# Altium PCB STM32.PcbDoc (part 1 of 6)
Units mm, origin at the board's own origin, x right, y up, seen from the top; angles counter-clockwise.
Board outline 99.69 x 99.7 mm, 2 copper layers (Top Layer, Bottom Layer); 150 components, 142 nets, 668 pads, 273 vias.
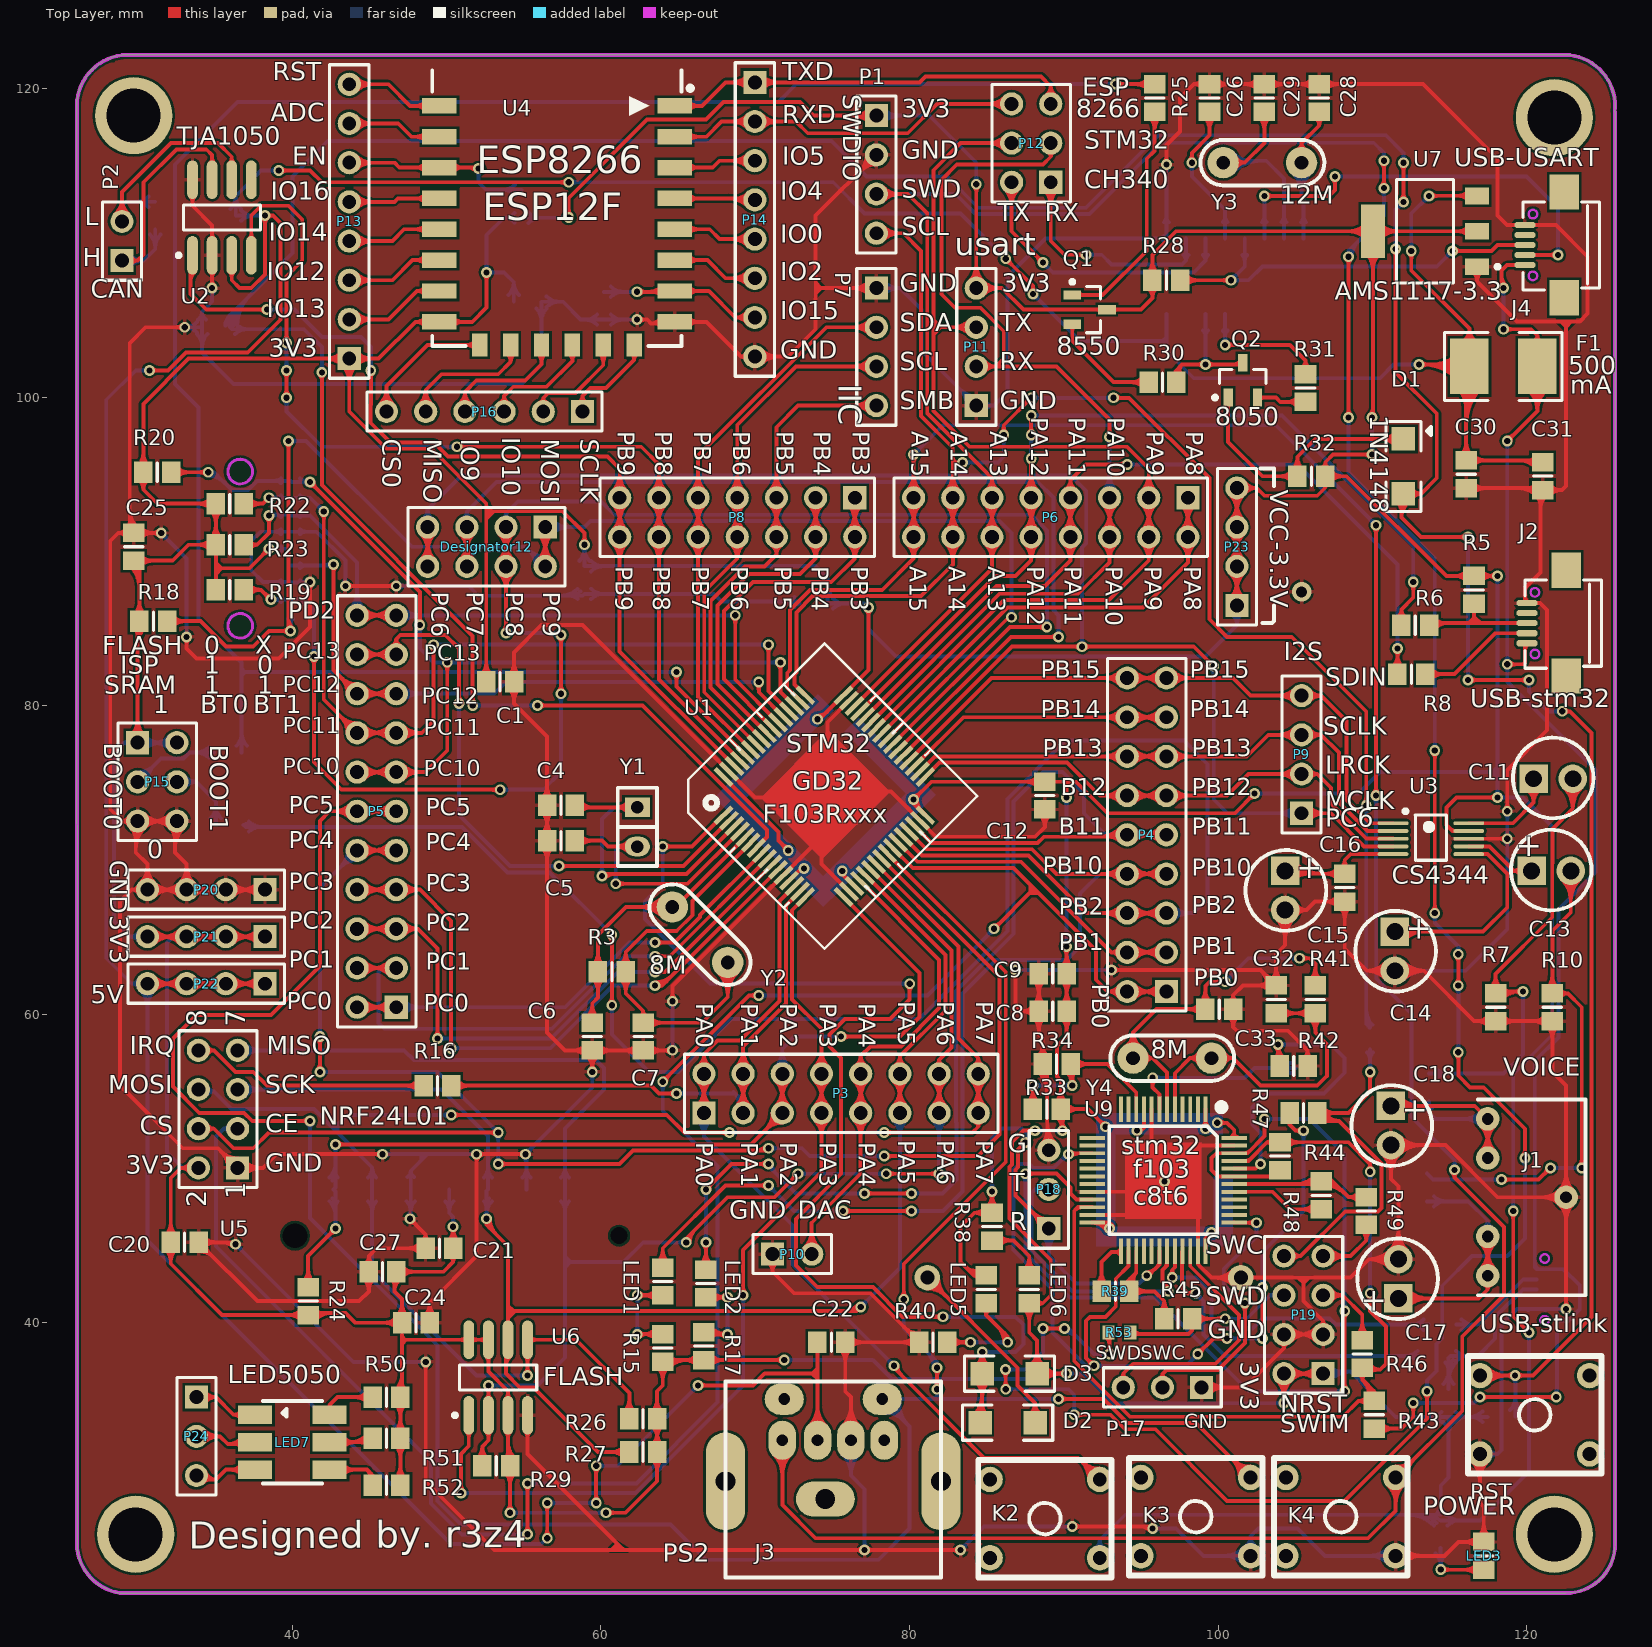
[diagram p0: Top Layer view]
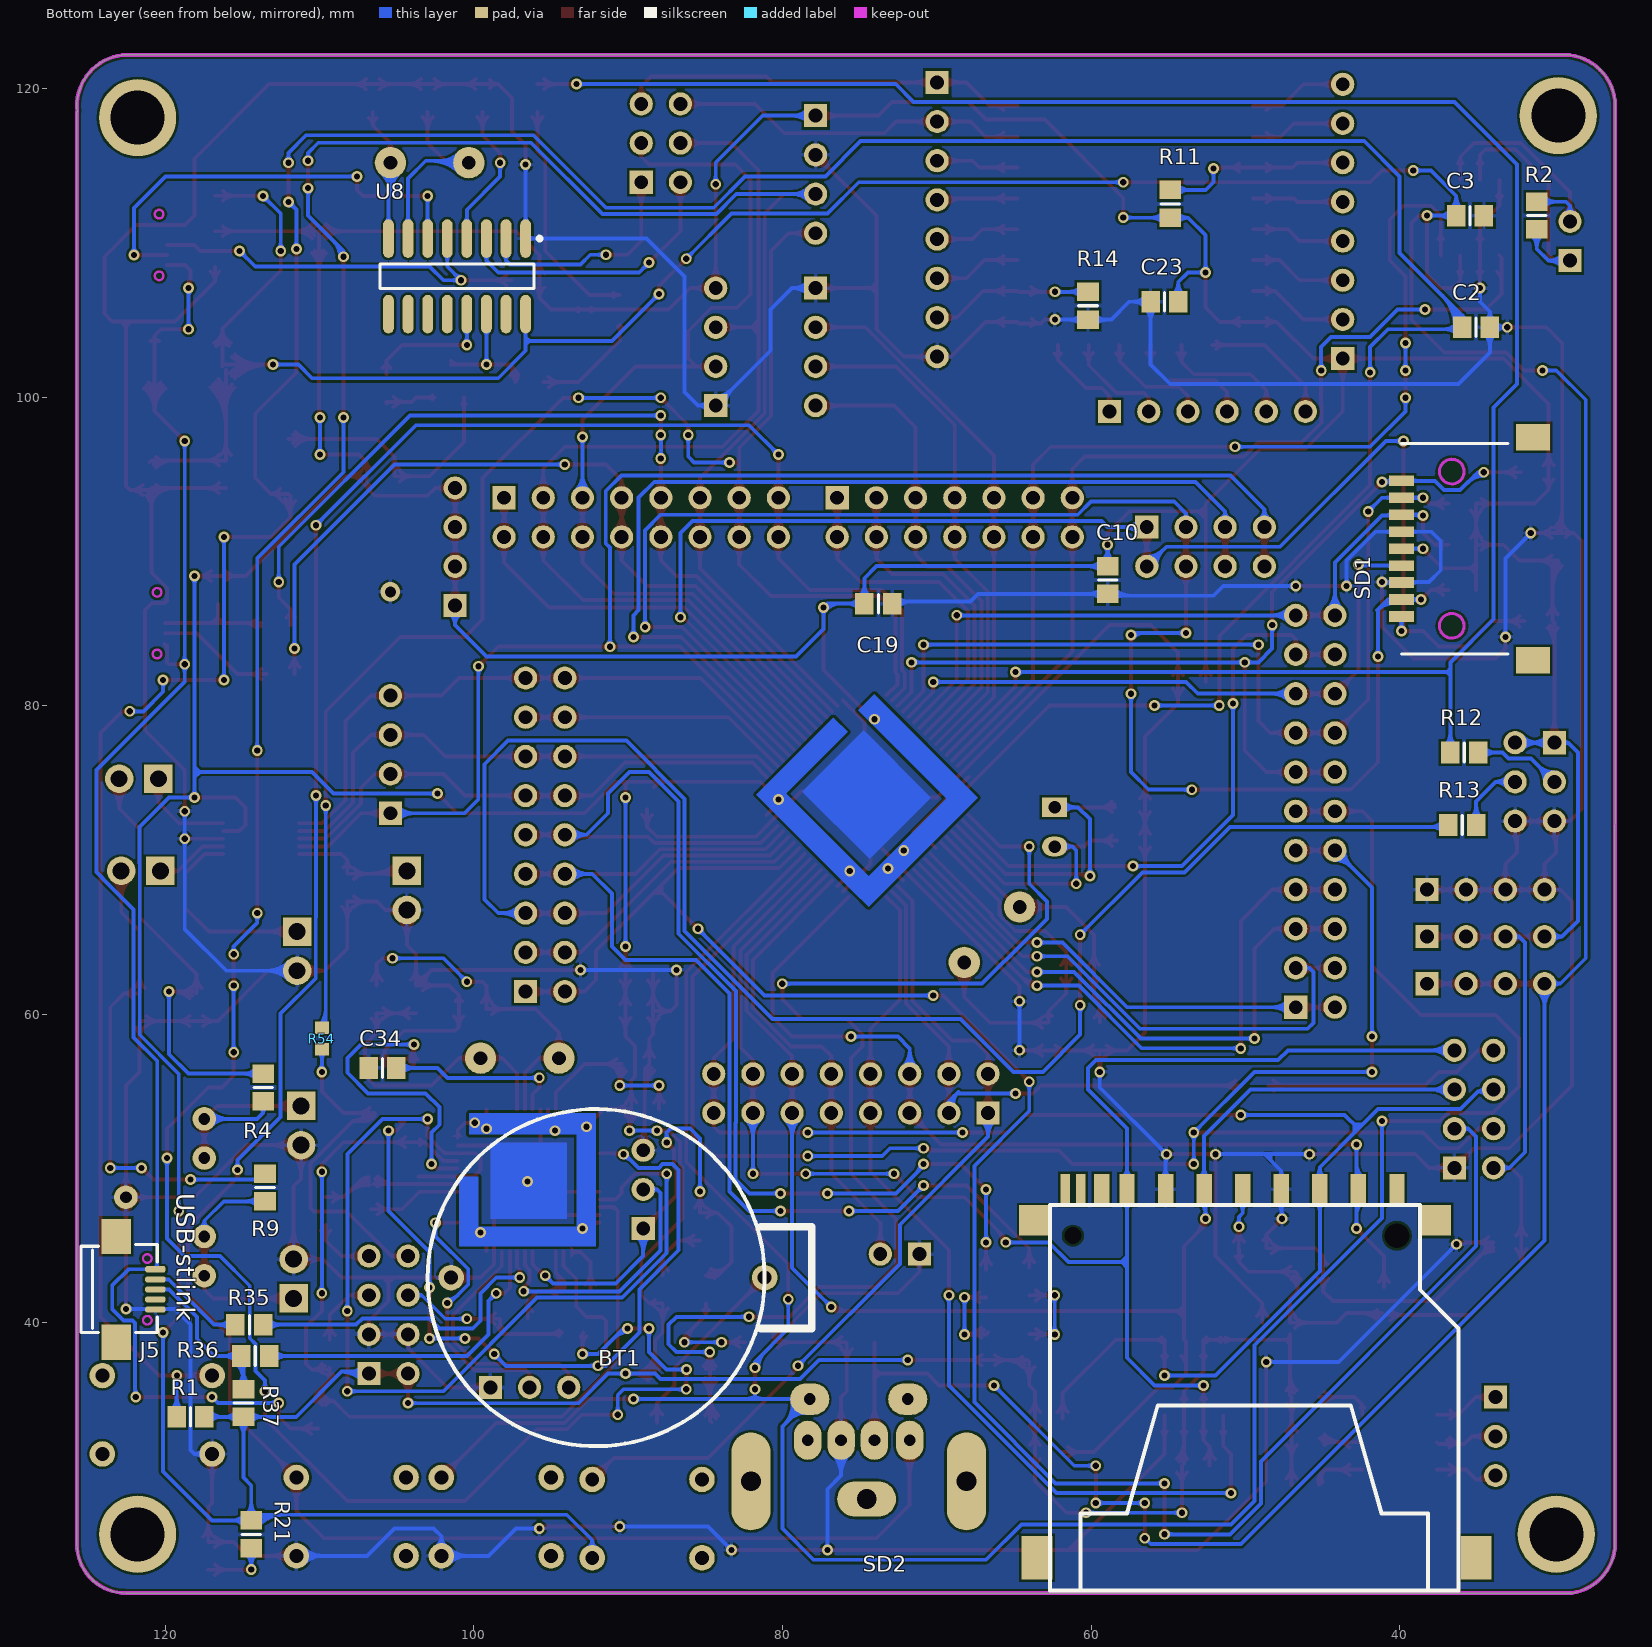
[diagram p1: Bottom Layer view, seen from below]

## Layer stack, top to bottom
Top Solder: solder mask 0.0102, Solder Resist, Dk 3.5
Top Layer: signal copper 0.0356
Dielectric1: dielectric 0.32, FR-4, Dk 4.8
Bottom Layer: signal copper 0.0356
Bottom Solder: solder mask 0.0102, Solder Resist, Dk 3.5

## Board outline
26.051,25.366 ccw(c29.332,25.743) 28.829,22.479 122.555,22.479 ccw(c122.555,25.654) 125.73,25.654 125.73,118.491 125.708,118.494 ccw(c122.428,118.872) 122.806,122.152 122.806,122.174 28.956,122.174 28.958,122.152 ccw(c29.335,118.872) 26.054,119.251 26.035,119.253

## Design rules (kind name [scope] priority, off if disabled: settings)
Clearance [All] p1: gap=0.152 ignorepadtopadclearanceinfootprint=FALSE except(0: Arc-Hole Track-Hole SMDPad-Hole THPad-Hole Via-Hole Fill-Hole Poly-Hole Region-Hole Text-Hole)
PolygonConnect [All] p1: connectstyle=Relief reliefconductorwidth=0.254 reliefentries=4 polygonreliefangle="90 Angle" airgapwidth=0.254
RoutingVias [All] p1: holewidth=0.4 width=0.7 viastyle="Through Hole" minholewidth=0.4 minwidth=0.7 maxholewidth=0.4 maxwidth=0.7
SMDNeckDown [All] p1: percent=50.000
SolderMaskExpansion [All] p1: expansion=0.102 istentingtop=FALSE
Width [All] p1: maxlimit=0.8 minlimit=0.25 preferedwidth=0.5
30 further rules are at their usual default settings.

## Classes and differential pairs
component class STLINK: C32 C33 J5 LED5 LED6 LED7 P17 P18 P19 P20 P21 P22 P23 P24 R33 R34 R35 R36 R37 R38 R39 R40 R41 R43 R44 R45 R46 R47 R48 R49 R50 R51 R52 R53 R54 U9 Y4
component class STM32: BT1 C1 C2 C3 C4 C5 C6 C7 C8 C9 C10 C11 C12 C13 C14 C15 C16 C17 C18 C19 C20 C21 C22 C23 C24 C25 C26 C27 C28 C29 C30 C31 D1 D2 D3 F1 J1 J2 J3 J4 K2 K3 K4 LED1 LED2 LED3 P1 P2 P3 P4 P5 P6 P7 P8 P10 P11 P13 P14 P15 P16 Q1 Q2 R1 R2 R3 R4 R5 R6 R7 R8 R9 R10 R11 R12 R13 R14 R15 R16 R17 R18 R19 R20 R21 R22 R23 R24 R25 R26 R27 R28 R29 R30 R31 R32 RST SD1 SD2 U1 U2 U3 U4 U5 U6 U7 U8 Y1 Y2 Y3

## Components (designator, comment, footprint, x,y, rotation, side; value= is the part's Value field where it differs from the comment)
BT1 "电池" µç³Ø×ù 65.786,24.13 r270 bottom locked
C1 "Cap" 6-0805_N 53.467,81.534 r0 top
C2 "Cap" 6-0805_N 35.052,104.521 r180 bottom
C3 "Cap" 6-0805_N 35.433,111.76 r0 bottom
C4 "Cap" 6-0805_N 57.404,73.533 r0 top
C5 "Cap" 6-0805_N 57.404,71.247 r0 top
C6 "Cap" 6-0805_N 59.436,58.547 r90 top
C7 "Cap" 6-0805_N 62.738,58.547 r90 top
C8 "Cap" 6-0805_N 89.281,60.198 r0 top
C9 "Cap" 6-0805_N 89.281,62.611 r0 top
C10 "Cap" 6-0805_N 58.928,88.138 r270 bottom
C11 "Cap Pol3" ¼«ÐÔµçÈÝ 121.92,75.946 r0 top
C12 "Cap" 6-0805_N 88.773,74.168 r270 top
C13 "Cap Pol3" ¼«ÐÔµçÈÝ 121.793,69.977 r0 top
C14 "Cap Pol3" ¼«ÐÔµçÈÝ 112.141,63.881 r270 top
C15 "Cap Pol3" ¼«ÐÔµçÈÝ 105.029,67.818 r270 top
C16 "Cap" 6-0805_N 108.204,68.199 r270 top
C17 "Cap Pol3" ¼«ÐÔµçÈÝ 110.998,43.053 r90 top
C18 "Cap Pol3" ¼«ÐÔµçÈÝ 111.887,52.578 r270 top
C19 "Cap" 6-0805_N 73.787,86.614 r180 bottom
C20 "Cap" 6-0805_N 33.02,45.212 r180 top
C21 "Cap" 6-0805_N 49.53,44.831 r180 top
C22 "Cap" 6-0805_N 74.93,38.735 r180 top
C23 "Cap" 6-0805_N 55.245,106.172 r0 bottom
C24 "Cap" 6-0805_N 48.006,40.005 r0 top
C25 "Cap" 6-0805_N 29.718,90.297 r90 top
C26 "Cap" 6-0805_N 99.441,119.38 r90 top
C27 "Cap" 6-0805_N 45.847,43.307 r180 top
C28 "Cap" 6-0805_N 106.553,119.38 r270 top
C29 "Cap" 6-0805_N 102.997,119.38 r270 top
C30 "Cap" 6-0805_N 116.078,94.996 r90 top
C31 "Cap" 6-0805_N 121.031,94.869 r90 top
C32 "Cap" 6-0805_N 103.759,60.96 r270 top
C33 "Cap" 6-0805_N 100.076,60.325 r180 top
C34 "Cap" 6-0805_N 105.918,56.515 r180 bottom
D1 "1N4148" 1206 112.014,95.504 r90 top
D2 "1N4148" 1206 86.36,33.528 r180 top
D3 "1N4148" 1206 86.487,36.703 r180 top
Designator12 "Comment" HDR2X4 56.388,91.567 r180 top
F1 "500MA" 1812 118.491,101.981 r0 top
J1 "Component_1" ¶ú»ú×ù 122.555,48.133 r90 top
J2 "USB_M" "USB MICRO 2" 122.555,85.344 r90 top
J3 "PS/2" PS/2 68.072,23.495 r90 top
J4 "USB_M" "USB MICRO 2" 122.428,109.855 r90 top
J5 "USB_M" "USB MICRO 2" 123.19,42.164 r270 bottom
K2 "按键" °´¼ü 88.773,27.305 r270 top
K3 "按键" °´¼ü 98.552,27.432 r270 top
K4 "按键" °´¼ü 107.95,27.432 r270 top
LED1 "LED" 6-0805_N 64.008,42.672 r90 top
LED2 "LED" 6-0805_N 66.802,42.545 r90 top
LED3 "LED" 6-0805_N 117.221,24.892 r90 top
LED5 "LED" 6-0805_N 84.963,42.164 r270 top (schematic designator D2)
LED6 "LED" 6-0805_N 87.757,42.164 r90 top (schematic designator D3)
LED7 "50550" led5050 40.005,32.258 r0 top
P1 "stlink" HDR1X4 77.851,118.237 r270 top
P2 "Header 2" HDR1X2 28.956,108.839 r90 top
P3 "Header 8X2" HDR2X8 66.675,53.594 r0 top
P4 "Header 9X2" HDR2X9 96.647,61.468 r90 top
P5 "Header 11X2" HDR2X11 46.736,60.452 r90 top
P6 "Header 8X2" HDR2X8 98.044,93.472 r180 top
P7 "I2C" HDR1X4 77.851,107.061 r270 top
P8 "Header 7X2" HDR2X7 76.454,93.472 r180 top
P9 "Header 4" HDR1X4 105.41,73.025 r90 top
P10 "DAC" HDR1X2 71.12,44.45 r0 top
P11 "串口" HDR1X4 84.328,99.441 r90 top
P12 "串口选择" HDR2X3 89.154,113.919 r90 top
P13 "Header 8" HDR1X8 43.688,102.489 r90 top
P14 "Header 8" HDR1X8 69.977,120.396 r270 top
P15 "boot选择" HDR2X3 29.972,77.597 r270 top
P16 "Header 6" HDR1X6 58.801,99.06 r180 top
P17 "ST-LINK" HDR1X3 98.933,35.814 r180 top
P18 "串口" HDR1X3 89.027,46.101 r90 top
P19 "Header 4X2" HDR2X4 106.807,36.703 r90 top
P20 "Header 4" HDR1X4 38.227,68.072 r180 top
P21 "Header 4" HDR1X4 38.227,65.024 r180 top
P22 "Header 4" HDR1X4 38.227,61.976 r180 top
P23 "Header 4" HDR1X4 101.219,86.487 r90 top (schematic designator P21)
P24 "Header 3" HDR1X3 33.782,35.179 r270 top
Q1 "8550" SOT-23B_N 91.676,105.664 r0 top
Q2 "8050" SOT-23B_N 101.6,101.092 r90 top
R1 "Res2" 6-0805_N 118.364,33.909 r0 bottom
R2 "Res2" 6-0805_N 31.115,111.76 r90 bottom
R3 "Res2" 6-0805_N 60.706,62.738 r0 top
R4 "Res2" 6-0805_N 113.665,55.245 r90 bottom
R5 "Res2" 6-0805_N 116.586,87.503 r270 top
R6 "Res2" 6-0805_N 112.776,85.217 r0 top
R7 "Res2" 6-0805_N 117.983,60.452 r90 top
R8 "Res2" 6-0805_N 112.522,82.042 r0 top
R9 "Res2" 6-0805_N 113.538,48.768 r270 bottom
R10 "Res2" 6-0805_N 121.666,60.452 r90 top
R11 "Res2" 6-0805_N 54.864,112.522 r90 bottom
R12 "Res2" 6-0805_N 35.814,76.962 r180 bottom
R13 "Res2" 6-0805_N 35.941,72.263 r0 bottom
R14 "Res2" 6-0805_N 60.198,105.918 r90 bottom
R15 "Res2" 6-0805_N 64.008,38.365 r90 top
R16 "Res2" 6-0805_N 49.403,55.372 r0 top
R17 "Res2" 6-0805_N 66.675,38.481 r90 top
R18 "Res2" 6-0805_N 30.988,85.471 r0 top
R19 "Res2" 6-0805_N 35.941,87.503 r0 top
R20 "Res2" 6-0805_N 31.242,95.123 r0 top
R21 "Res2" 6-0805_N 114.427,26.289 r270 bottom
R22 "Res2" 6-0805_N 35.941,93.091 r0 top
R23 "Res2" 6-0805_N 35.941,90.424 r0 top
R24 "Res2" 6-0805_N 41.021,41.402 r90 top
R25 "Res2" 6-0805_N 95.885,119.38 r90 top
R26 "Res2" 6-0805_N 62.738,33.782 r180 top
R27 "Res2" 6-0805_N 62.738,31.623 r180 top
R28 "Res2" 6-0805_N 96.647,107.569 r180 top
R29 "Res2" 6-0805_N 53.213,30.734 r180 top
R30 "Res2" 6-0805_N 96.393,100.965 r0 top
R31 "Res2" 6-0805_N 105.664,100.584 r90 top
R32 "Res2" 6-0805_N 106.045,94.869 r180 top
R33 "RES" 6-0805_N 88.9,53.848 r0 top
R34 "RES" 6-0805_N 89.535,56.769 r0 top
R35 "RES" 6-0805_N 114.554,39.878 r180 bottom
R36 "RES" 6-0805_N 114.173,37.846 r180 bottom
R37 "RES" 6-0805_N 114.935,34.798 r270 bottom
R38 "RES" 6-0805_N 85.344,46.228 r90 top
R39 "RES" 6-0805_N 93.345,42.037 r180 top
R40 "RES" 6-0805_N 81.534,38.735 r0 top
R41 "Res2" 6-0805_N 106.299,60.96 r90 top
R42 "RES" 6-0805_N 104.902,56.642 r180 top
R43 "RES" 6-0805_N 110.109,34.036 r90 top
R44 "RES" 6-0805_N 104.013,50.8 r90 top
R45 "RES" 6-0805_N 97.409,40.259 r180 top
R46 "RES" 6-0805_N 109.347,37.973 r270 top
R47 "RES" 6-0805_N 105.537,53.594 r180 top
R48 "RES" 6-0805_N 106.68,48.26 r90 top
R49 "RES" 6-0805_N 109.601,47.244 r90 top
R50 "RES" 6-0805_N 46.101,35.179 r180 top
R51 "RES" 6-0805_N 46.101,32.512 r180 top
R52 "RES" 6-0805_N 46.101,29.464 r180 top
R53 "RES" 1608[0603] 93.599,39.37 r0 top
R54 "RES" 1608[0603] 109.855,58.42 r270 bottom
RST "key" °´¼ü 120.523,34.036 r90 top (schematic designator K1)
SD1 "PJS008-2000" TFCARD-M 30.48,90.17 r180 bottom
SD2 "PJS008-2000" SDCARD_A 42.672,48.641 r270 bottom
U1 "STM32F103RCT6" LQFP-64 67.945,72.898 r45 top
U2 "TJA1050T" SO8_M 35.433,111.633 r90 top
U3 "CS4344" TSSOP110_s 113.792,71.374 r0 top
U4 "Component_1" ESP_12_f 49.149,118.872 r0 top
U5 "NRF24l01" HDR2X4 36.449,50.038 r90 top
U6 "25Q32" SO8_M 53.34,36.449 r90 top
U7 "AMS117-3.3" ZZ311 113.411,110.744 r90 top
U8 "Component_1" SO-16_M 101.092,107.823 r270 bottom
U9 "STM32F103C8T6" LQFP48S 99.187,53.848 r270 top
Y1 "33.768K" SIP2 62.357,73.406 r270 top
Y2 "8M" ¾§Õñ 66.421,65.151 r315 top
Y3 "12M" ¾§Õñ 102.87,115.189 r180 top
Y4 "8M" ¾§Õñ 97.028,57.15 r180 top

## Footprints (in the part's own frame and the unit in brackets; to place one, negate y for a bottom-side part, rotate by r counter-clockwise, add the part's x,y. Pads: shape width x height; smd on the part's side, far side on the other; paste and mask are expansions set on the pad)
6-0805_N [mm] "Chip Resistor, Body 2.0x1.2mm, IPC Medium Density"
  rect 1.2x1.4 smd: 1(-0.9,0) 2(0.9,0)
  silkscreen extent 0,-0.6 0,0.6, body extent -1.07,-0.7 1.07,0.7, height 0.7
1206 [mil] "ÌùÆ¬Ôª¼þ"
  rect 60x60 smd: 1(-70,0) 2(70,0)
  silkscreen extent -115,-45 115,45, body extent -75,-35 75,35, height 39
1608[0603] [mm] "Chip Capacitor, Body 1.6x0.8mm, IPC High Density"
  rect 0.8x0.9 smd: 1(-0.7,0) 2(0.7,0)
  body extent -0.87,-0.48 0.87,0.48, height 1.3
1812 [mm] "±£ÏÕË¿"
  rect 2.5x3.6 smd: 1(-2.2,0) 2(2.2,0)
  silkscreen extent -3.81,-2.2 3.81,2.2, body extent -2.54,-1.65 2.67,1.65, height 1.2
ESP_12_f [mm] "ESP-12 Wi-Fi Module by AI-Thinker"
  rect 2.25x1 smd: 1(15.625,0) 2(15.625,-2) 3(15.625,-4) 4(15.625,-6) 5(15.625,-8) 6(15.625,-10) 7(15.625,-12) 8(15.625,-14) 15(0.375,-14) 16(0.375,-12) 17(0.375,-10) 18(0.375,-8) 19(0.375,-6) 20(0.375,-4) 21(0.375,-2) 22(0.375,0)
  rect 1x1.5 smd: 9(13,-15.5) 10(11,-15.5) 11(9,-15.5) 12(7,-15.5) 13(5,-15.5) 14(3,-15.5)
  silkscreen extent -0.08,-15.57 16.79,2.29
HDR1X2 [mm] "Connector; Header; 2 Position"
  rect 1.5x1.5 hole 0.9: 1(0,0)
  round 1.5 hole 0.9: 2(2.54,0)
  silkscreen extent -1.27,-1.27 3.81,1.27
HDR1X3 [mm] "Connector; Header; 3 Position"
  rect 1.5x1.5 hole 0.9: 1(0,0)
  round 1.5 hole 0.9: 2(2.54,0) 3(5.08,0)
  silkscreen extent -1.27,-1.27 6.35,1.27
HDR1X4 [mm] "Connector; Header; 4 Position"
  rect 1.5x1.5 hole 0.9: 1(0,0)
  round 1.5 hole 0.9: 2(2.54,0) 3(5.08,0) 4(7.62,0)
  silkscreen extent -1.27,-1.27 8.89,1.27
HDR1X6 [mm] "Connector; Header; 6 Position"
  rect 1.5x1.5 hole 0.9: 1(0,0)
  round 1.5 hole 0.9: 2(2.54,0) 3(5.08,0) 4(7.62,0) 5(10.16,0) 6(12.7,0)
  silkscreen extent -1.27,-1.27 13.97,1.27
HDR1X8 [mm] "Connector; Header; 8 Position"
  rect 1.5x1.5 hole 0.9: 1(0,0)
  round 1.5 hole 0.9: 2(2.54,0) 3(5.08,0) 4(7.62,0) 5(10.16,0) 6(12.7,0) 7(15.24,0) 8(17.78,0)
  silkscreen extent -1.27,-1.27 19.05,1.27
HDR2X3 [mm] "Connector; Header; 3x2 Position"
  rect 1.5x1.5 hole 0.9: 1(0,0)
  round 1.5 hole 0.9: 2(0,2.54) 3(2.54,0) 4(2.54,2.54) 5(5.08,0) 6(5.08,2.54)
  silkscreen extent -1.27,-1.27 6.35,3.81
HDR2X4 [mm] "Connector; Header; 4x2 Position"
  rect 1.5x1.5 hole 0.9: 1(0,0)
  round 1.5 hole 0.9: 2(0,2.54) 3(2.54,0) 4(2.54,2.54) 5(5.08,0) 6(5.08,2.54) 7(7.62,0) 8(7.62,2.54)
  silkscreen extent -1.27,-1.27 8.89,3.81
HDR2X7 [mm] "Connector; Header; 7x2 Position"
  rect 1.5x1.5 hole 0.9: 1(0,0)
  round 1.5 hole 0.9: 2(0,2.54) 3(2.54,0) 4(2.54,2.54) 5(5.08,0) 6(5.08,2.54) 7(7.62,0) 8(7.62,2.54) 9(10.16,0) 10(10.16,2.54) 11(12.7,0) 12(12.7,2.54) 13(15.24,0) 14(15.24,2.54)
  silkscreen extent -1.27,-1.27 16.51,3.81
HDR2X8 [mm] "Connector; Header; 8x2 Position"
  rect 1.5x1.5 hole 0.9: 1(0,0)
  round 1.5 hole 0.9: 2(0,2.54) 3(2.54,0) 4(2.54,2.54) 5(5.08,0) 6(5.08,2.54) 7(7.62,0) 8(7.62,2.54) 9(10.16,0) 10(10.16,2.54) 11(12.7,0) 12(12.7,2.54) 13(15.24,0) 14(15.24,2.54) 15(17.78,0) 16(17.78,2.54)
  silkscreen extent -1.27,-1.27 19.05,3.81
HDR2X9 [mm] "Connector; Header; 9x2 Position"
  rect 1.5x1.5 hole 0.9: 1(0,0)
  round 1.5 hole 0.9: 2(0,2.54) 3(2.54,0) 4(2.54,2.54) 5(5.08,0) 6(5.08,2.54) 7(7.62,0) 8(7.62,2.54) 9(10.16,0) 10(10.16,2.54) 11(12.7,0) 12(12.7,2.54) 13(15.24,0) 14(15.24,2.54) 15(17.78,0) 16(17.78,2.54) 17(20.32,0) 18(20.32,2.54)
  silkscreen extent -1.27,-1.27 21.59,3.81
HDR2X11 [mm] "Connector; Header; 11x2 Position"
  rect 1.5x1.5 hole 0.9: 1(0,0)
  round 1.5 hole 0.9: 2(0,2.54) 3(2.54,0) 4(2.54,2.54) 5(5.08,0) 6(5.08,2.54) 7(7.62,0) 8(7.62,2.54) 9(10.16,0) 10(10.16,2.54) 11(12.7,0) 12(12.7,2.54) 13(15.24,0) 14(15.24,2.54) 15(17.78,0) 16(17.78,2.54) 17(20.32,0) 18(20.32,2.54) 19(22.86,0) 20(22.86,2.54) 21(25.4,0) 22(25.4,2.54)
  silkscreen extent -1.27,-1.27 26.67,3.81
led5050 [mm]
  rect 2.2x1.2 smd: 1(-2.413,1.778) 2(-2.413,0) 3(-2.413,-1.778) 4(2.413,1.778) 5(2.413,0) 6(2.413,-1.778)
  silkscreen extent -1.91,-2.67 1.91,2.67
LQFP48S [mil] "DPIN-0.5"
  rect 65x10 smd: 1(0.42,0.29) 2(0.42,-19.39) 3(0.42,-39.08) 4(0.42,-58.76) 5(0.42,-78.45) 6(0.42,-98.13) 7(0.42,-117.82) 8(0.42,-137.5) 9(0.42,-157.19) 10(0.42,-176.87) 11(0.42,-196.56) 12(0.42,-216.24) 25(362.63,-216.24) 26(362.63,-196.56) 27(362.63,-176.87) 28(362.63,-157.19) 29(362.63,-137.5) 30(362.63,-117.82) 31(362.63,-98.13) 32(362.63,-78.45) 33(362.63,-58.76) 34(362.63,-39.08) 35(362.63,-19.39) 36(362.63,0.29)
  rect 10x65 smd: 13(73.26,-289.08) 14(92.94,-289.08) 15(112.63,-289.08) 16(132.31,-289.08) 17(152,-289.08) 18(171.68,-289.08) 19(191.37,-289.08) 20(211.05,-289.08) 21(230.74,-289.08) 22(250.42,-289.08) 23(270.11,-289.08) 24(289.79,-289.08) 37(289.79,73.13) 38(270.11,73.13) 39(250.42,73.13) 40(230.74,73.13) 41(211.05,73.13) 42(191.37,73.13) 43(171.68,73.13) 44(152,73.13) 45(132.31,73.13) 46(112.63,73.13) 47(92.94,73.13) 48(73.26,73.13)
  silkscreen extent -10,-246 319,46
LQFP-64 [mil]
  rect 60x12 smd: 1(0,0) 2(0,-19.69) 3(0,-39.37) 4(0,-59.05) 5(0,-78.74) 6(0,-98.43) 7(0,-118.11) 8(0,-137.8) 9(0,-157.48) 10(0,-177.17) 11(0,-196.85) 12(0,-216.54) 13(0,-236.22) 14(0,-255.9) 15(0,-275.59) 16(0,-295.28) 33(433.07,-295.28) 34(433.07,-275.59) 35(433.07,-255.91) 36(433.07,-236.22) 37(433.07,-216.54) 38(433.07,-196.85) 39(433.07,-177.17) 40(433.07,-157.48) 41(433.07,-137.8) 42(433.07,-118.11) 43(433.07,-98.43) 44(433.07,-78.74) 45(433.07,-59.06) 46(433.07,-39.37) 47(433.07,-19.69) 48(433.07,0)
  rect 12x60 smd: 17(68.9,-364.17) 18(88.58,-364.17) 19(108.27,-364.17) 20(127.95,-364.17) 21(147.64,-364.17) 22(167.32,-364.17) 23(187.01,-364.17) 24(206.69,-364.17) 25(226.38,-364.17) 26(246.06,-364.17) 27(265.75,-364.17) 28(285.43,-364.17) 29(305.12,-364.17) 30(324.81,-364.17) 31(344.49,-364.17) 32(364.17,-364.17) 49(364.17,68.89) 50(344.49,68.89) 51(324.8,68.9) 52(305.12,68.9) 53(285.44,68.9) 54(265.75,68.9) 55(246.06,68.9) 56(226.38,68.9) 57(206.69,68.9) 58(187.01,68.9) 59(167.32,68.9) 60(147.64,68.89) 61(127.95,68.9) 62(108.27,68.9) 63(88.58,68.9) 64(68.9,68.9)
  silkscreen extent -59,-423 492,128
PS/2 [mil]
  oval 80x100 hole 30: 1(455,-400) 6(455,-150)
  oval 100x70 hole 30: 2(350,-405) 3(350,-320) 4(350,-235) 5(350,-145)
  oval 90x150 hole 50: ""(200,-255)
  oval 250x100 hole 50: ""(245,0) ""(245,-550)
  silkscreen extent 0,-550 500,0
SDCARD_A [mm] "SD¿¨²»×Ôµ¯"
  rect 2x1 smd: 1(0,0) 2(0,-2.5) 3(0,-5) 4(0,-7.5) 5(0,-10) 6(0,-12.5) 7(0,-15) 8(0,-16.625) 9(0,2.5)
  rect 2x0.6 smd: 10(0,-19) 11(0,-18)
  rect 2x2 smd: 12(2,5) 13(2,-21)
  rect 2.8x2 smd: 14(23.876,-20.828) 15(23.876,7.62)
  round 1.5 hole 1.6: 16(3,2.5)
  round 1 hole 1.1: 17(3,-18.5)
  silkscreen extent 1,-20 26,6.5
SIP2 [mil]
  rect 50x64 hole 32: 1(0,0)
  oval 50x64 hole 32: 2(100,0)
  silkscreen extent -50,-50 150,50
SO8_M [mm] "SOIC, 8-Leads, Body 4.9x3.9mm, Pitch 1.27mm, IPC Low Density"
  oval 2.5x0.7 smd: 1(-2.45,1.905) 2(-2.45,0.635) 3(-2.45,-0.635) 4(-2.45,-1.905) 5(2.45,-1.905) 6(2.45,-0.635) 7(2.45,0.635) 8(2.45,1.905)
  silkscreen extent -2.57,-2.5 0.8,2.93, body extent -2,-2.5 2,2.5, height 1.75
SO-16_M [mm] "SOIC, 16-Leads, Body 9.9x3.9mm, Pitch 1.27mm, IPC Low Density"
  oval 2.5x0.7 smd: 1(-2.45,4.445) 2(-2.45,3.175) 3(-2.45,1.905) 4(-2.45,0.635) 5(-2.45,-0.635) 6(-2.45,-1.905) 7(-2.45,-3.175) 8(-2.45,-4.445) 9(2.45,-4.445) 10(2.45,-3.175) 11(2.45,-1.905) 12(2.45,-0.635) 13(2.45,0.635) 14(2.45,1.905) 15(2.45,3.175) 16(2.45,4.445)
  silkscreen extent -2.57,-5 0.8,5.47, body extent -2,-5 2,5, height 1.75
SOT-23B_N [mm] "SOT23, 3-Leads, Body 2.9x1.3mm, Pitch 0.95mm, Lead Span 2.4mm, IPC Medium Density"
  rect 1.15x0.6 smd: 1(-1.125,0.95) 2(-1.125,-0.95) 3(1.125,0)
  silkscreen extent -1.25,-1.5 0.7,1.92, body extent -0.7,-1.5 0.7,1.5, height 1.14
TFCARD-M [mm] "TF¿¨"
  rect 1.6x0.7 smd: 1(-9.398,3.3) 2(-9.398,2.2) 3(-9.398,1.1) 4(-9.398,0) 5(-9.398,-1.1) 6(-9.398,-2.2) 7(-9.398,-3.3) 8(-9.398,-4.4) 9(-9.398,4.4)
  rect 2.2x1.7 smd: 10(-0.88,-7.23) 11(-0.88,7.23)
  Keep-Out Layer circle w0.2: c-6.137,-5 r0.8
  Keep-Out Layer circle w0.2: c-6.137,5 r0.8
  silkscreen extent -9.4,-6.83 -2.5,6.83
TSSOP110_s [mm] "TSOP, 16-Leads, Body 5x4.4mm, Pitch 0.5mm, IPC Low Density"
  oval 2x0.25 smd: 1(-2.45,1) 2(-2.45,0.5) 3(-2.45,0) 4(-2.45,-0.5) 5(-2.45,-1) 6(2.45,-1) 7(2.45,-0.5) 8(2.45,0) 9(2.45,0.5) 10(2.45,1)
  silkscreen extent -1.78,-1.4 1.02,1.9, body extent -1.43,-1.65 1.43,1.53, height 1.1
"USB MICRO 2" [mm] "USB·½¿×"
  oct 0.4x1.35 smd: 1(-1.3,2.54) 2(-0.65,2.54) 3(0,2.54) 4(1.3,2.54) 5(0.65,2.54)
  rect 2.286x1.9 smd: 6(3.429,0) 7(-3.429,0)
  Keep-Out Layer circle w0.15: c2,2.023 r0.28
  Keep-Out Layer circle w0.15: c-2,2.023 r0.28
  silkscreen extent -2.92,-2.29 2.79,2.67
ZZ311 [mm] "SOT-223/SC-73; 4 Leads; Body 6.7 x 7.3 mm, inc. leads (LxW max)"
  rect 1.1x1.55 smd: 1(-2.3,-3.375) 2(0,-3.375) 3(2.3,-3.375)
  rect 3.45x1.55 smd: 4(0,3.375)
  silkscreen extent -3.35,-4.83 3.35,1.85
°´¼ü [mm]
  round 1.652 hole 0.9: 1(2.54,3.556) 2(-2.54,3.556) 3(-2.54,-3.556) 4(2.54,-3.556)
  silkscreen extent -3.81,-4.32 3.81,4.32
µç³Ø×ù [mil]
  round 65.06 hole 35.43 unplated: 1(-740,-605) 2(-740,-1405)
  silkscreen extent -1170,-1465 -310,-485
¶ú»ú×ù [mil]
  round 60 hole 30: 1(0,0) 2(-200,200) 2(-100,200) 3(100,200) 3(200,200)
  silkscreen extent -250,-50 250,225
¼«ÐÔµçÈÝ [mm]
  rect 1.85x1.85 hole 1.1: 1(-1.473,-0.686)
  round 1.85 hole 1.1: 2(1.067,-0.686)
  silkscreen extent -2.81,-3.25 2.41,1.98
¾§Õñ [mil]
  round 80 hole 35: 1(-100,0) 2(100,0)
  silkscreen extent -158,-58 158,58

## Part data
BT1: library part µç³Ø
C1 C2 C3 C4 C5 C6 C7 C8 C9 C10 C12 C16 C19 C20 C21 C22 C23 C24 C25 C26 C27 C28 C29 C30 C31 C32 C33: "Capacitor"
C11 C13 C14 C15 C17 C18: "Polarized Capacitor (Surface Mount)"
D1 D2 D3: library part "Diode 1N4148", "High Conductance Fast Diode"
F1: library part "Fuse 1", "Fuse"
K2 K3 K4 RST: library part °´¼ü
LED1 LED2 LED3: library part ·¢¹â¶þ¼«¹Ü
LED7: library part "Header 3X2A", "Header, 3-Pin, Dual row"
P1 P7 P11: library part "Header 4", "Header, 4-Pin"
P2: "Header, 2-Pin"
P3 P6: "Header, 8-Pin, Dual row"
P4: "Header, 9-Pin, Dual row"
P5: "Header, 11-Pin, Dual row"
P8: "Header, 7-Pin, Dual row"
P9 P20 P21 P22 P23: "Header, 4-Pin"
P10: library part "Header 2", "Header, 2-Pin"
P12 P15: library part "Header 3X2", "Header, 3-Pin, Dual row"
P13 P14: "Header, 8-Pin"
P16: "Header, 6-Pin"
P17 P18: library part "Header 3", "Header, 3-Pin"
P19: "Header, 4-Pin, Dual row"
P24: "Header, 3-Pin"
Q1: library part PNP, "PNP Bipolar Transistor"
Q2: library part NPN, "NPN Bipolar Transistor"
R1 R2 R3 R4 R5 R6 R7 R8 R9 R10 R11 R12 R13 R14 R15 R16 R17 R18 R19 R20 R21 R22 R23 R24 R25 R26 R27 R28 R29 R30 R31 R32 R41: "Resistor"
SD1 SD2: library part SMS016AFA5E
U1: library part STM32F103RDT6, "ST High-density performance line ARM-based 32-bit MCU with 256 to  512KB Flash, USB, CAN, 11 timers, 3 ADCs, 13 communication interfaces"
U2 U3 U6: library part Component_1
U5: library part "Header 4X2", "Header, 4-Pin, Dual row"
U7: library part REG1117-3.3, "800mA and 1A Low Dropout Positive Regulator 2.85V, 3.3V, 5V, and Adjustable"
U9: "STM32 ARM-based 32-bit MCU with 64 Kbytes Flash, 48-pin LQFP, Industrial Temperature"
Y1 Y2 Y3 Y4: library part ¾§Õñ

## Free pads (board coordinates)
  round 5 hole 3.5 paste+0 mask+0.102: 0(29.718,118.237) 0(29.845,26.289) 0(121.793,26.289) 0(121.793,118.11)

## Via types
v1: diameter 0.7, hole 0.4, Top Layer to Bottom Layer, 272 vias
v2: diameter 1.27, hole 0.711, Top Layer to Bottom Layer, 1 vias

## Nets (pads, with @x,y where several pads share a name; then routed paths per layer and width w, separated by ;. In a path a pad name is that pad's centre, name@x,y a point inside that pad or via, vN(x,y) a via of type N, cw(c..) or ccw(c..) an arc to the next point about the centre after c; other vN are vias at no path point)
5V: F1.2 J2.1 J4.1 J5.1 R43.1 | length 123.7
  Top Layer w0.25: R43.1@110.109,33.136 110.12,33.147 111.887,33.147 112.649,33.909 v1(112.649,34.798) ; R43.1@110.545,32.8 cw(c111.382,31.963) 111.382,33.147 ; R43.1@110.545,33.472 ccw(c111.329,34.256) 111.329,33.147 ; v1@112.49,34.639 cw(c112.106,34.255) 112.649,34.255 cw(c113.192,34.255) v1@112.808,34.639 ; v1(116.967,35.179) v1(121.92,35.179) ; v1@117.126,35.02 cw(c117.51,34.636) 117.51,35.179 cw(c117.51,35.722) v1@117.126,35.338 ; 118.364,107.911 ccw(c119.341,107.911) v1@118.65,107.22 ; v1(118.491,104.394) 120.269,104.394 120.691,103.972 ; v1(118.491,107.061) 118.364,107.188 118.364,108.204 118.715,108.555 J4.1@119.888,108.555 ; v1@118.65,104.235 cw(c119.034,103.851) 119.034,104.394 cw(c119.034,104.937) v1@118.65,104.553 ; v1(118.745,82.677) 119.761,82.677 119.887,82.803 J2.1@119.887,83.916 ; v1(118.745,97.155) 120.691,99.101 ; v1@118.745,97.38 ccw(c118.745,97.923) 119.129,97.539 ccw(c119.513,97.155) v1@118.97,97.155 ; v1@118.904,82.518 cw(c119.288,82.134) 119.288,82.677 cw(c119.288,83.22) v1@118.904,82.836 ; 119.887,83.554 cw(c120.505,83.554) J2.1@120.068,83.991 ; F1.2@119.991,100.55 cw(c118.841,99.101) 120.691,99.101 ; F1.2@120.147,100.746 cw(c119.252,99.619) 120.691,99.619 cw(c122.13,99.619) F1.2@121.235,100.746 ; F1.2@120.302,100.942 cw(c119.663,100.137) 120.691,100.137 cw(c121.719,100.137) F1.2@121.08,100.942 ; F1.2@120.418,103.622 ccw(c120.331,103.972) 120.691,103.972 ; F1.2@120.964,103.622 cw(c121.051,103.972) 120.691,103.972 ; F1.2@121.391,100.55 ccw(c122.541,99.101) 120.691,99.101 ; v1@121.761,35.02 ccw(c121.377,34.636) 121.377,35.179 ccw(c121.377,35.722) v1@121.761,35.338 ; 120.691,99.101 F1.2@120.691,101.981 120.691,103.972
  Bottom Layer w0.25: v1(112.649,34.798) 116.586,34.798 v1(116.967,35.179) ; v1@112.808,34.639 cw(c113.192,34.255) 113.192,34.798 cw(c113.192,35.341) v1@112.808,34.957 ; v1@118.332,104.553 ccw(c117.948,104.937) 118.491,104.937 ccw(c119.034,104.937) v1@118.65,104.553 ; v1@118.332,106.902 cw(c117.948,106.518) 118.491,106.518 cw(c119.034,106.518) v1@118.65,106.902 ; v1(118.491,104.394) v1(118.491,107.061) ; v1@118.586,82.518 cw(c118.202,82.134) 118.745,82.134 cw(c119.288,82.134) v1@118.904,82.518 ; v1@118.586,82.836 ccw(c118.202,83.22) 118.745,83.22 ccw(c119.288,83.22) v1@118.904,82.836 ; v1@118.586,96.996 cw(c118.202,96.612) 118.745,96.612 cw(c119.288,96.612) v1@118.904,96.996 ; v1(118.745,97.155) v1(118.745,82.677) 118.745,81.534 124.46,75.819 124.46,69.215 124.062,68.817 124.062,68.793 122.06,66.791 122.06,58.499 120.523,56.962 120.523,43.591 J5.1@120.65,43.464 122.398,43.464 123.444,42.418 123.444,40.896 122.704,40.155 122.125,40.155 121.963,39.993 121.963,35.263 122.047,35.179 v1(121.92,35.179) ; 120.523,43.952 ccw(c121.138,43.952) J5.1@120.703,43.517 ; v1@121.761,35.338 ccw(c121.274,35.825) 121.963,35.825 ; 121.963,35.619 ccw(c122.36,35.619) v1@122.079,35.338
(NRS): P19.7 R49.1 | length 9.5
  Top Layer w0.25: P19.7@106.807,44.323 108.585,44.323 109.601,45.339 ; P19.7@107.072,44.058 cw(c107.712,43.418) 107.712,44.323 cw(c107.712,45.228) P19.7@107.072,44.588 ; P19.7@107.249,43.881 cw(c108.316,42.814) 108.316,44.323 cw(c108.316,45.832) P19.7@107.249,44.765 ; R49.1@109.299,45.977 cw(c108.775,45.339) 109.601,45.339 ; R49.1@109.601,46.344 109.601,45.339 ; R49.1@109.903,45.977 ccw(c110.427,45.339) 109.601,45.339
(SWCLK): P19.8 R47.1 R54.2 | length 30.8
  Top Layer w0.254: P19.8@104.267,44.323 105.338,44.323 ; P19.8@104.809,44.015 cw(c105.338,43.714) 105.338,44.323 ; P19.8@104.809,44.631 ccw(c105.338,44.932) 105.338,44.323 ; R47.1@106.405,53.479 ccw(c107.024,53.769) R47.1@107.024,53.086 ; R47.1@106.437,53.594 108.458,53.594 109.855,54.991 v1(109.855,56.261) ; R47.1@106.635,53.587 ccw(c107.423,53.956) 107.423,53.086 ; R47.1@106.771,53.26 cw(c107.579,52.452) 107.579,53.594 cw(c107.579,54.736) R47.1@106.771,53.928 ; R47.1@106.865,53.695 ccw(c107.823,54.144) 107.823,53.086 ; R47.1@106.945,53.086 107.823,53.086 ; v1@109.697,56.103 cw(c109.317,55.723) 109.855,55.723 cw(c110.393,55.723) v1@110.013,56.103 ; 105.338,44.323 108.239,47.223 110.376,47.223 110.58,47.428 110.58,50.329 107.823,53.086
  Bottom Layer w0.254: R54.2@109.662,57.527 cw(c109.196,57.061) 109.855,57.061 cw(c110.514,57.061) R54.2@110.048,57.527 ; v1@109.697,56.419 ccw(c109.317,56.799) 109.855,56.799 ccw(c110.393,56.799) v1@110.013,56.419 ; v1(109.855,56.261) R54.2@109.855,57.72
(SWDIO): P19.6 R45.1 R53.2 | length 17.3
  Top Layer w0.254: R53.2@94.299,39.37 94.389,39.28 98.081,39.28 98.309,39.508 ; R53.2@94.492,39.127 cw(c94.861,38.758) 94.861,39.28 ; R53.2@94.492,39.513 ccw(c95.056,40.077) 95.056,39.28 ; R45.1@98.163,39.709 cw(c98.098,39.508) 98.309,39.508 ; R45.1@98.455,39.709 ccw(c98.52,39.508) 98.309,39.508 ; R45.1@98.643,39.925 cw(c99.451,39.117) 99.451,40.259 cw(c99.451,41.401) R45.1@98.643,40.593 ; v1@100.299,40.101 ccw(c99.919,39.721) 99.919,40.259 ccw(c99.919,40.797) v1@100.299,40.417 ; v1(100.457,40.259) R45.1@98.309,40.259 98.309,39.508
  Bottom Layer w0.254: v1(100.457,40.259) 101.854,40.259 103.378,41.783 ; v1@100.615,40.101 cw(c100.995,39.721) 100.995,40.259 cw(c100.995,40.797) v1@100.615,40.417 ; P19.6@103.681,41.57 ccw(c103.378,41.46) 103.378,41.783 ; P19.6@103.681,41.996 cw(c103.378,42.106) 103.378,41.783 ; P19.6@104.267,41.783 103.378,41.783
(SWIM): P19.5 R46.1 | length 9.4
  Top Layer w0.25: P19.5@106.807,41.783 108.077,41.783 ; P19.5@107.104,41.554 cw(c107.569,41.196) 107.569,41.783 cw(c107.569,42.37) P19.5@107.104,42.012 ; P19.5@107.302,41.402 cw(c108.077,40.805) 108.077,41.783 ; P19.5@107.302,42.164 ccw(c108.077,42.761) 108.077,41.783 ; R46.1@109.011,39.209 ccw(c108.2,40.02) 109.347,40.02 ccw(c110.494,40.02) R46.1@109.683,39.209 ; R46.1@109.347,38.873 109.347,40.513 108.077,41.783
BOOT0: R12.1 R25.2 U1.60 | length 148
  Top Layer w0.25: v1@64.738,82.01 cw(c64.354,81.626) 64.897,81.626 cw(c65.44,81.626) v1@65.056,82.01 ; v1(64.897,82.169) 64.897,81.249 U1.60@69.359,76.787 ; v1(93.356,120.28) R25.2@95.885,120.28 ; v1@93.515,120.121 cw(c93.899,119.737) 93.899,120.28 cw(c93.899,120.823) v1@93.515,120.439 ; R25.2@95.449,119.944 ccw(c94.638,119.133) 94.638,120.28 ccw(c94.638,121.427) R25.2@95.449,120.616
  Bottom Layer w0.25: R12.1@36.378,77.398 ccw(c35.567,78.209) 36.714,78.209 ccw(c37.861,78.209) R12.1@37.05,77.398 ; R12.1@36.714,76.962 36.714,82.169 ; v1@64.738,82.01 ccw(c64.354,81.626) 64.354,82.169 ccw(c64.354,82.712) v1@64.738,82.328 ; v1(64.897,82.169) 36.714,82.169 ; v1@93.197,120.121 ccw(c92.813,119.737) 92.813,120.28 ccw(c92.813,120.823) v1@93.197,120.439 ; v1(93.356,120.28) 72.655,120.28 71.501,119.126 36.449,119.126 32.385,115.062 32.385,100.838 33.909,99.314 33.909,85.598 36.714,82.793 36.714,82.169
BOOT1: P4.5 P4.6 R13.2 U1.28 | length 139.2
  Top Layer w0.25: v1@60.547,60.738 ccw(c60.163,61.122) 60.706,61.122 ccw(c61.249,61.122) v1@60.865,60.738 ; v1@60.547,64.992 cw(c60.163,64.608) 60.706,64.608 cw(c61.249,64.608) v1@60.865,64.992 ; v1(60.706,60.579) v1(60.706,65.151) ; P4.6@94.107,66.548 P4.5@96.647,66.548 ; P4.6@94.372,66.283 cw(c95.012,65.643) 95.012,66.548 cw(c95.012,67.453) P4.6@94.372,66.813 ; P4.6@94.549,66.106 cw(c95.616,65.039) 95.616,66.548 cw(c95.616,68.057) P4.6@94.549,66.99 ; P4.5@96.205,66.106 ccw(c95.138,65.039) 95.138,66.548 ccw(c95.138,68.057) P4.5@96.205,66.99 ; P4.5@96.382,66.283 ccw(c95.742,65.643) 95.742,66.548 ccw(c95.742,67.453) P4.5@96.382,66.813
  Top Layer w0.254: U1.28@79.612,71.484 80.812,70.284 87.704,70.284 91.44,66.548 P4.6@94.107,66.548 ; P4.6@93.666,66.107 ccw(c92.603,65.044) 92.603,66.548 ccw(c92.603,68.052) P4.6@93.666,66.989 ; P4.6@93.846,66.287 ccw(c93.216,65.657) 93.216,66.548 ccw(c93.216,67.439) P4.6@93.846,66.809
  Bottom Layer w0.25: R13.2@36.841,72.263 36.979,72.125 51.001,72.125 53.934,69.192 56.665,69.192 v1(60.706,65.151) ; R13.2@37,72.322 ccw(c37.477,72.799) 37.477,72.125 ; R13.2@37.177,71.827 cw(c37.895,71.109) 37.895,72.125 ; R13.2@37.177,72.499 ccw(c38.08,73.402) 38.08,72.125 ; v1@60.481,65.151 ccw(c59.938,65.151) 60.322,65.535 ccw(c60.706,65.919) v1@60.706,65.376 ; v1@60.547,60.42 cw(c60.163,60.036) 60.706,60.036 cw(c61.249,60.036) v1@60.865,60.42 ; v1(60.706,60.579) 60.706,58.674 63.119,56.261 65.024,56.261 68.453,59.69 80.647,59.69 86.339,65.382 86.339,73.954 90.12,77.735 97.779,77.735 99.314,76.2 99.314,67.437 98.425,66.548 P4.5@96.647,66.548 ; P4.5@96.912,66.283 cw(c97.552,65.643) 97.552,66.548 cw(c97.552,67.453) P4.5@96.912,66.813 ; P4.5@97.089,66.106 cw(c98.156,65.039) 98.156,66.548 cw(c98.156,68.057) P4.5@97.089,66.99
ERX: P12.5 P14.1 U4.1 | length 37.6
  Top Layer w0.25: U4.1@64.774,118.872 66.548,118.872 68.072,120.396 P14.1@69.977,120.396 ; U4.1@65.664,118.607 cw(c66.304,117.967) 66.304,118.872 cw(c66.304,119.777) U4.1@65.664,119.137 ; P14.1@69.535,119.954 ccw(c68.468,118.887) 68.468,120.396 ccw(c68.468,121.905) P14.1@69.535,120.838 ; P14.1@69.712,120.131 ccw(c69.072,119.491) 69.072,120.396 ccw(c69.072,121.301) P14.1@69.712,120.661 ; P14.1@70.242,120.131 cw(c70.882,119.491) 70.882,120.396 cw(c70.882,121.301) P14.1@70.242,120.661 ; P14.1@70.358,120.777 P14.1@69.977,120.396 ; P14.1@70.419,119.954 cw(c71.486,118.887) 71.486,120.396 cw(c71.486,121.905) P14.1@70.419,120.838 ; P12.5@88.817,119.525 ccw(c88.421,120.142) 89.154,120.142 ; P12.5@89.154,118.999 89.154,120.142 ; P12.5@89.491,119.525 cw(c89.887,120.142) 89.154,120.142 ; P14.1@69.977,120.396 80.645,120.396 81.026,120.777 88.519,120.777 89.154,120.142
ETX: P12.6 P14.2 U4.2 | length 36.2
  Top Layer w0.25: U4.2@64.774,116.872 66.834,116.872 67.818,117.856 P14.2@69.977,117.856 72.644,117.856 73.406,117.094 79.883,117.094 81.788,118.999 P12.6@86.614,118.999 ; U4.2@65.664,116.607 cw(c66.304,115.967) 66.304,116.872 cw(c66.304,117.777) U4.2@65.664,117.137 ; P14.2@69.535,117.414 ccw(c68.468,116.347) 68.468,117.856 ccw(c68.468,119.365) P14.2@69.535,118.298 ; P14.2@69.712,117.591 ccw(c69.072,116.951) 69.072,117.856 ccw(c69.072,118.761) P14.2@69.712,118.121 ; P14.2@70.242,117.591 cw(c70.882,116.951) 70.882,117.856 cw(c70.882,118.761) P14.2@70.242,118.121 ; P14.2@70.419,117.414 cw(c71.486,116.347) 71.486,117.856 cw(c71.486,119.365) P14.2@70.419,118.298 ; P12.6@86.172,118.557 ccw(c85.105,117.49) 85.105,118.999 ccw(c85.105,120.508) P12.6@86.172,119.441 ; P12.6@86.349,118.734 ccw(c85.709,118.094) 85.709,118.999 ccw(c85.709,119.904) P12.6@86.349,119.264
FCS: P3.7 P3.8 U1.16 U6.1 | length 80.7
  Top Layer w0.25: v1@50.768,29.115 ccw(c50.384,29.499) 50.927,29.499 ccw(c51.47,29.499) v1@51.086,29.115 ; v1(50.927,28.956) 50.927,31.496 51.435,32.004 U6.1@51.435,33.999 ; U6.1@51.276,32.94 cw(c50.892,32.556) 51.435,32.556 ; 51.435,32.556 cw(c51.978,32.556) U6.1@51.594,32.94 ; v1@69.056,41.942 ccw(c68.672,42.326) 69.215,42.326 ccw(c69.758,42.326) v1@69.374,41.942 ; v1(69.215,41.783) 69.215,44.704 74.295,49.784 P3.7@74.295,53.594 P3.8@74.295,56.134 ; P3.7@73.853,53.152 cw(c72.786,52.085) 74.295,52.085 cw(c75.804,52.085) P3.7@74.737,53.152 ; P3.7@73.853,54.036 ccw(c72.786,55.103) 74.295,55.103 ccw(c75.804,55.103) P3.7@74.737,54.036 ; P3.8@73.853,55.692 cw(c72.786,54.625) 74.295,54.625 cw(c75.804,54.625) P3.8@74.737,55.692 ; P3.7@74.03,53.329 cw(c73.39,52.689) 74.295,52.689 cw(c75.2,52.689) P3.7@74.56,53.329 ; P3.7@74.03,53.859 ccw(c73.39,54.499) 74.295,54.499 ccw(c75.2,54.499) P3.7@74.56,53.859 ; P3.8@74.03,55.869 cw(c73.39,55.229) 74.295,55.229 cw(c75.2,55.229) P3.8@74.56,55.869
  Top Layer w0.254: U1.16@73.248,67.595 72.39,66.736 72.39,60.96 74.295,59.055 P3.8@74.295,56.134 ; P3.8@73.854,56.575 ccw(c72.791,57.638) 74.295,57.638 ccw(c75.799,57.638) P3.8@74.736,56.575 ; P3.8@74.034,56.395 ccw(c73.404,57.025) 74.295,57.025 ccw(c75.186,57.025) P3.8@74.556,56.395
  Bottom Layer w0.25: v1(50.927,28.956) 62.23,28.956 69.215,35.941 v1(69.215,41.783) ; v1@51.086,28.797 cw(c51.47,28.413) 51.47,28.956 cw(c51.47,29.499) v1@51.086,29.115 ; v1@69.056,41.624 cw(c68.672,41.24) 69.215,41.24 cw(c69.758,41.24) v1@69.374,41.624